# EAGLE board Sketch (EAGLE 7.5.0)
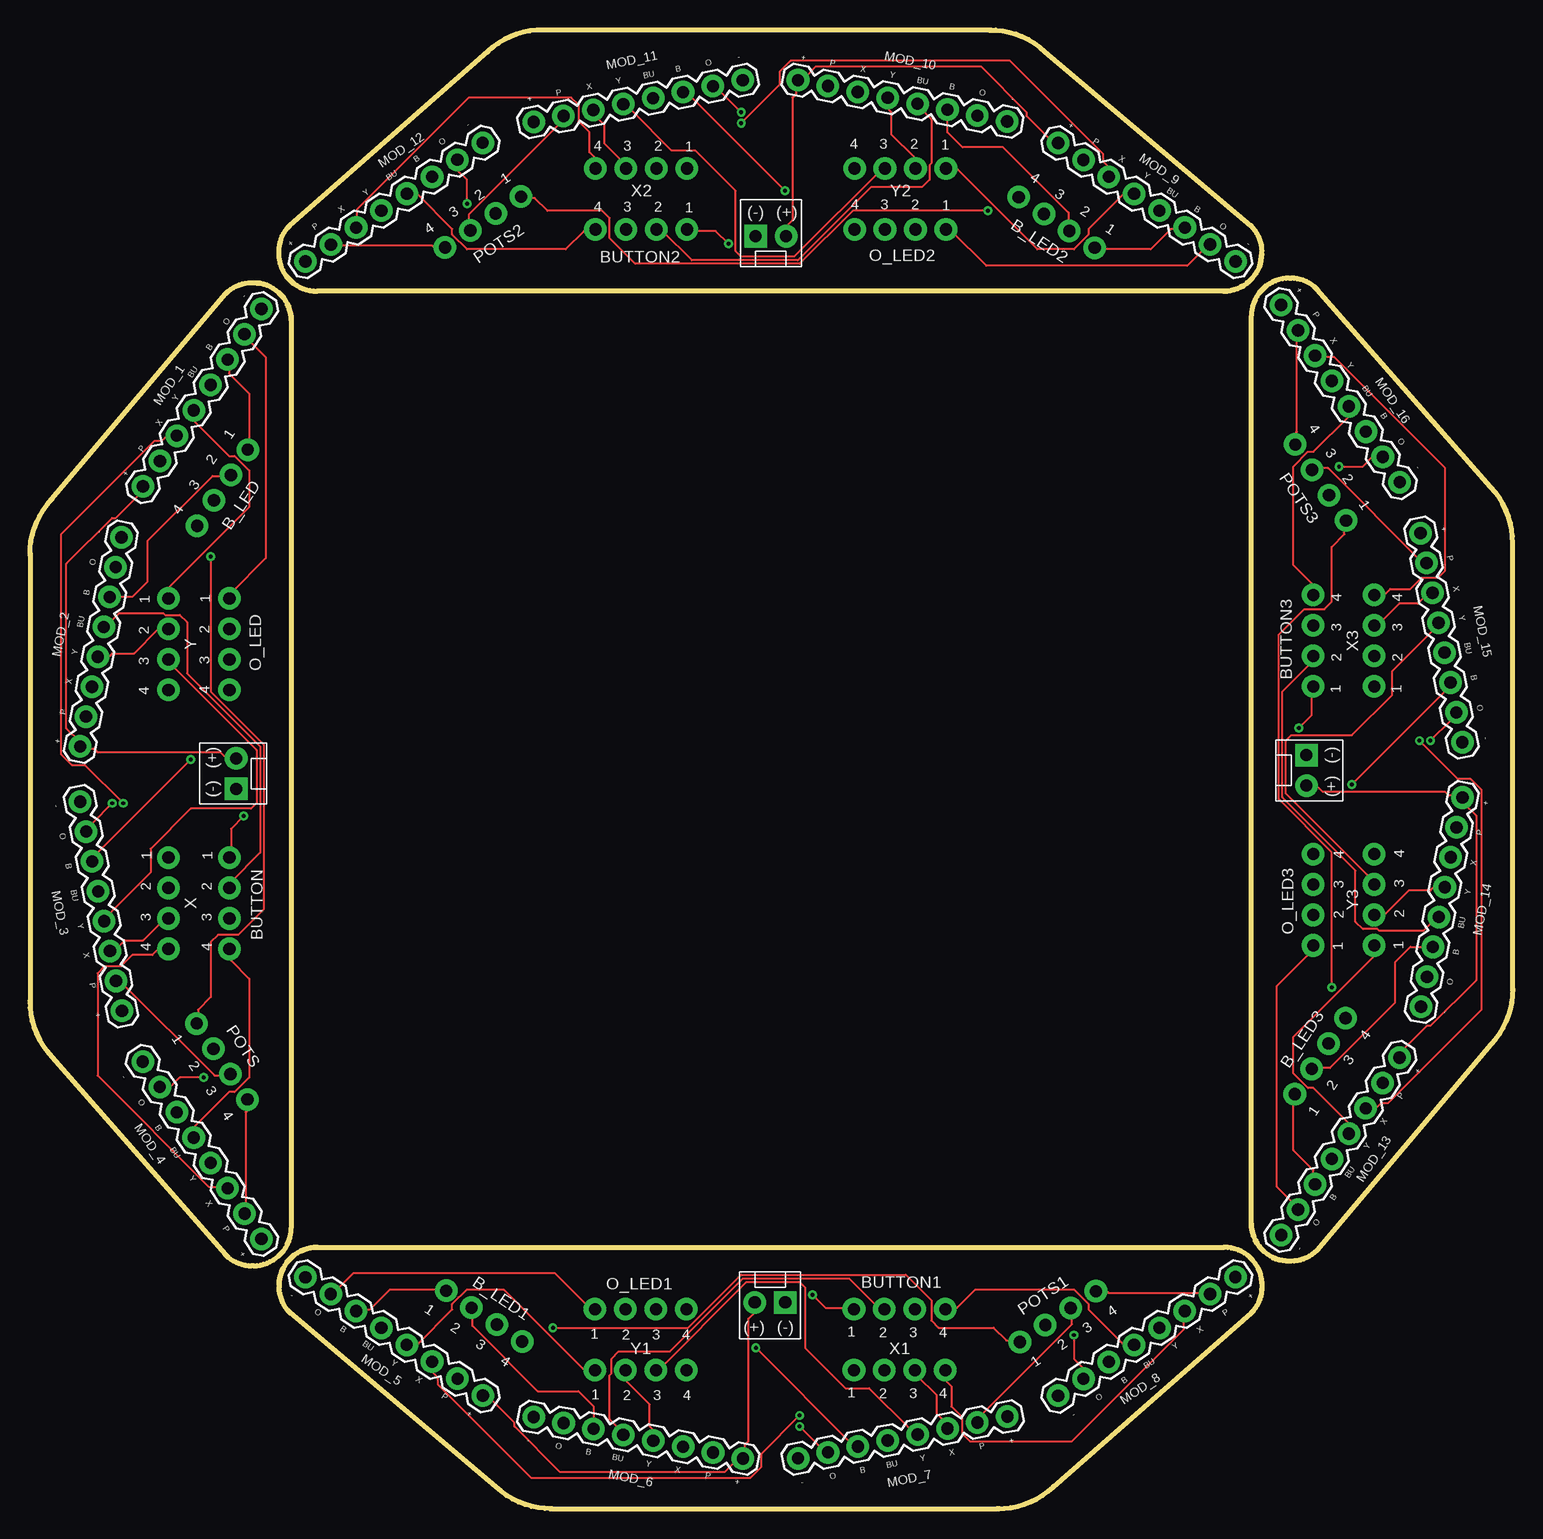
[diagram p0: board, top side]
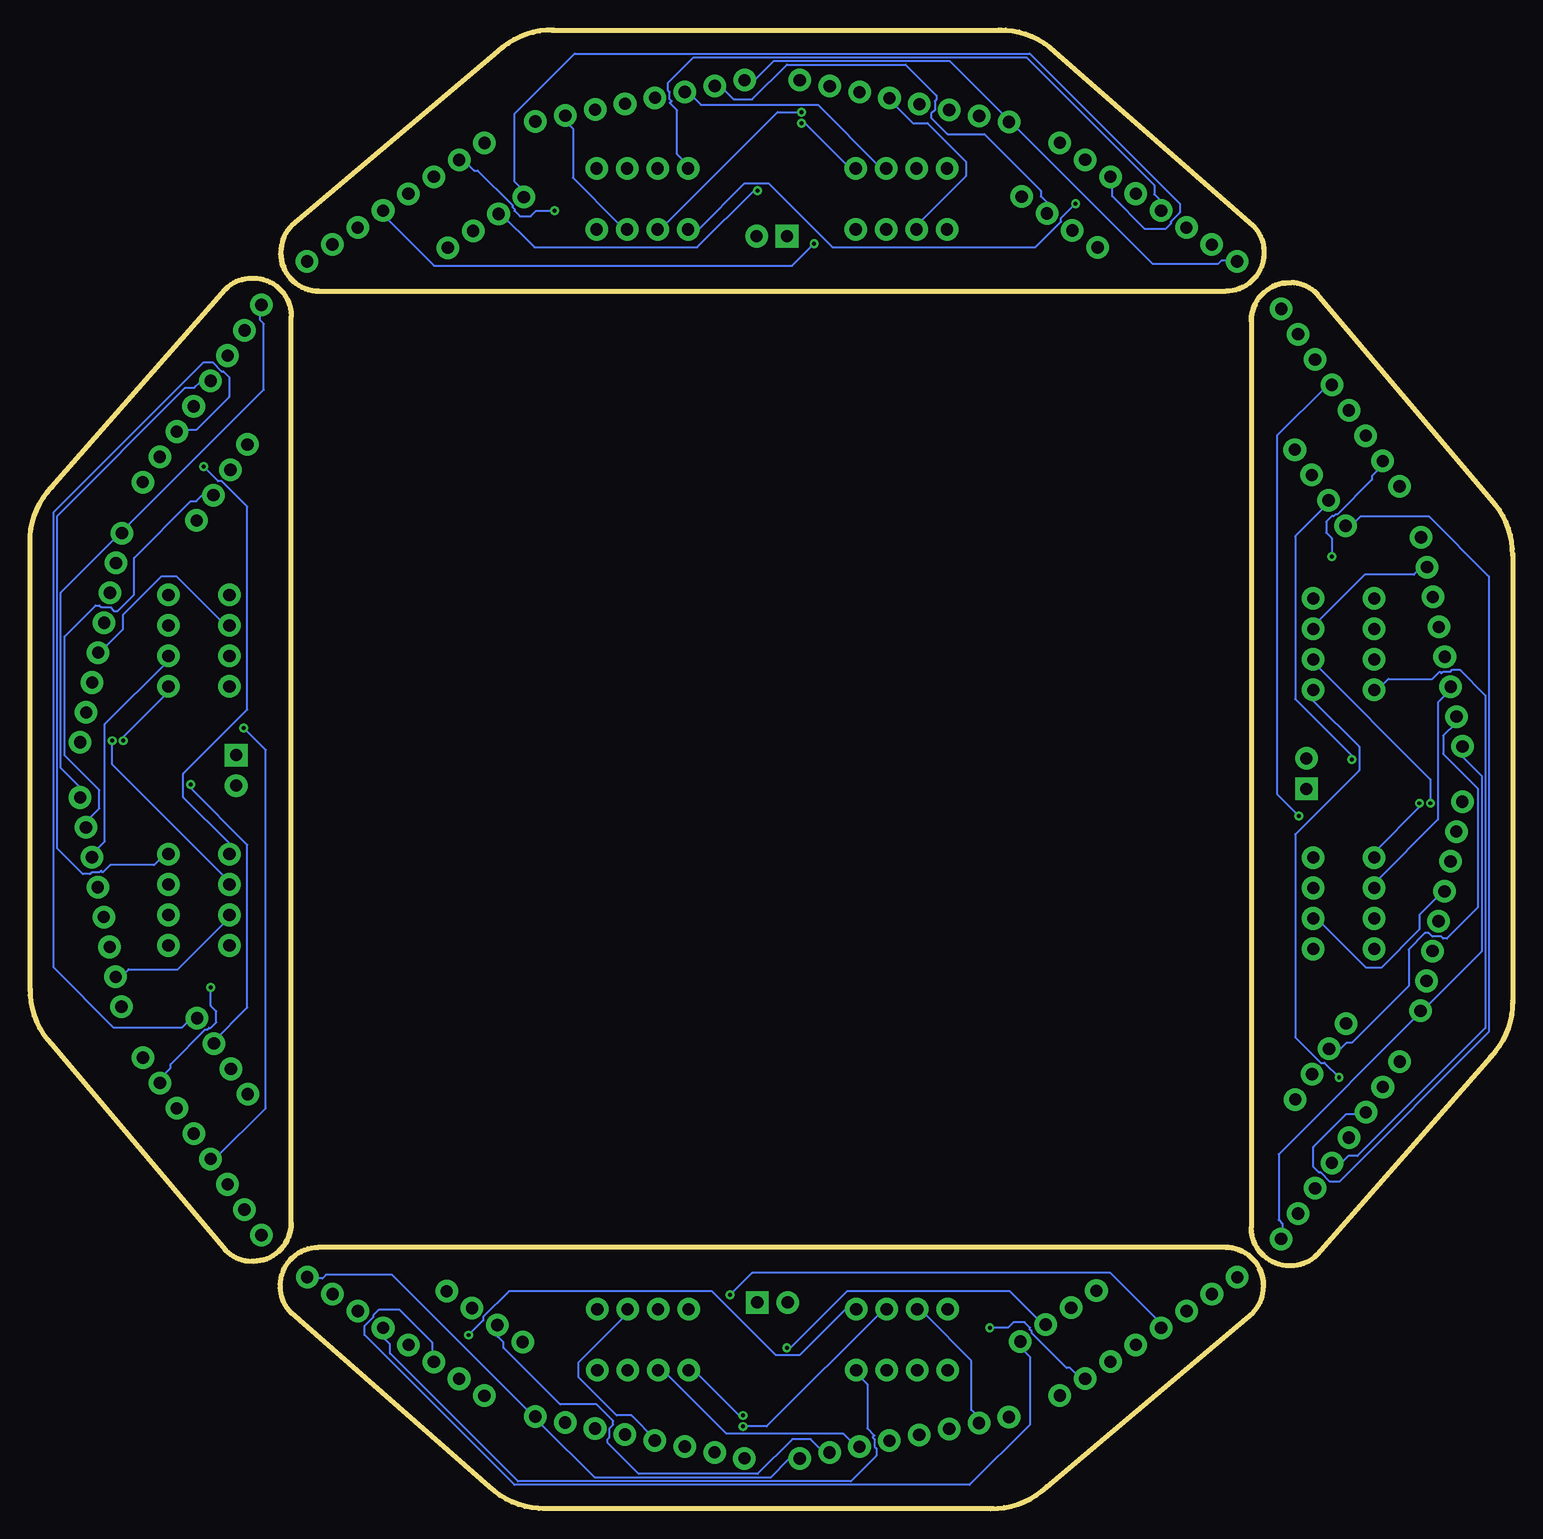
[diagram p1: board, bottom side, seen from below]

Size 123.59 x 123.26 mm. Coordinates in mm from the lower left corner, seen from the top.
Outline: 0,79.64 0,42.34
Outline: 0,42.34 0,42.15
Outline: 18.61,20.24 arc90 21.78,23.42 21.78,99.01
Outline: 21.78,99.01 arc90 18.61,102.19 arc-90 21.78,99.01
Outline: 0,42.34 arc45 1.82,37.66 16.31,21.14 arc45 18.48,20.24
Outline: 0,79.45 arc-45 1.82,84.13 16.31,101.29 arc-45 18.48,102.19
Outline: 43.32,0 80.62,0
Outline: 80.62,0 80.81,0
Outline: 102.72,18.61 arc90 99.54,21.78 23.95,21.78
Outline: 23.95,21.78 arc90 20.78,18.61 arc-90 23.95,21.78
Outline: 80.62,0 arc45 85.3,1.82 101.82,16.31 arc45 102.72,18.48
Outline: 43.51,0 arc-45 38.83,1.82 21.67,16.31 arc-45 20.78,18.48
Outline: 80.13,123.26 42.83,123.26
Outline: 42.83,123.26 42.64,123.26
Outline: 20.73,104.65 arc90 23.91,101.48 99.5,101.47
Outline: 99.5,101.47 arc90 102.67,104.65 arc-90 99.5,101.47
Outline: 42.83,123.26 arc45 38.15,121.43 21.63,106.95 arc45 20.73,104.78
Outline: 79.94,123.26 arc-45 84.62,121.43 101.78,106.94 arc-45 102.67,104.78
Outline: 123.59,43.17 123.59,80.47
Outline: 123.59,80.47 123.59,80.66
Outline: 104.99,102.57 arc90 101.81,99.39 101.81,23.8
Outline: 101.81,23.8 arc90 104.98,20.62 arc-90 101.81,23.8
Outline: 123.59,80.47 arc45 121.77,85.15 107.28,101.67 arc45 105.11,102.57
Outline: 123.59,43.36 arc-45 121.77,38.68 107.28,21.52 arc-45 105.11,20.62
Copper layers (1*16): Top 0.035mm / dielectric 1.5mm / Bottom 0.035mm
Design rules "default": minimum track width 10mil, minimum drill 24mil, track to track 8mil, track to pad 8mil, pad to pad 8mil, via to via 8mil, smd to smd 8mil, copper to edge 40mil, drill to drill 8mil, minimum pad ring 10mil, minimum via ring 8mil, stop-mask expansion 4mil, vias tented up to drill 0mil, thermal gap 10mil

## Footprints (pad centres in the part's own frame; a part is rotated, then mirrored left to right if it is on the bottom)
1X04_NO_SILK_ALL_ROUND = drill 1.016 pad 1.88: 1 0,0; 2 2.54,0; 3 5.08,0; 4 7.62,0
1X08_ROUND = drill 1.016 pad 1.88: 1 0,0; 2 2.54,0; 3 5.08,0; 4 7.62,0; 5 10.16,0; 6 12.7,0; 7 15.24,0; 8 17.78,0
MOLEX-1X2 = drill 1.016 pad 1.88 square: 1 0,0 | drill 1.016 pad 1.88: 2 2.54,0

## Placement (x,y rotation side)
B_LED  [1X04_NO_SILK_ALL_ROUND]  18.16,88.27 236.3 top
B_LED1  [1X04_NO_SILK_ALL_ROUND]  34.69,18.16 326.3 top
B_LED2  [1X04_NO_SILK_ALL_ROUND]  88.76,105.1 146.3 top
B_LED3  [1X04_NO_SILK_ALL_ROUND]  105.44,34.54 56.3 top
BUTTON  [1X04_NO_SILK_ALL_ROUND]  16.62,54.27 270 top
BUTTON1  [1X04_NO_SILK_ALL_ROUND]  68.69,16.62 0 top
BUTTON2  [1X04_NO_SILK_ALL_ROUND]  54.76,106.64 180 top
BUTTON3  [1X04_NO_SILK_ALL_ROUND]  106.97,68.54 90 top
MOD_1  [1X08_ROUND]  19.29,100.01 236.3 top
MOD_2  [1X08_ROUND]  7.63,80.97 258.8 top
MOD_3  [1X08_ROUND]  4.18,58.93 281.3 top
MOD_4  [1X08_ROUND]  9.41,37.25 303.8 top
MOD_5  [1X08_ROUND]  22.95,19.29 326.3 top
MOD_6  [1X08_ROUND]  41.99,7.63 348.8 top
MOD_7  [1X08_ROUND]  64.03,4.18 11.3 top
MOD_8  [1X08_ROUND]  85.71,9.41 33.8 top
MOD_9  [1X08_ROUND]  100.5,103.97 146.3 top
MOD_10  [1X08_ROUND]  81.46,115.63 168.8 top
MOD_11  [1X08_ROUND]  59.42,119.07 191.3 top
MOD_12  [1X08_ROUND]  37.74,113.85 213.8 top
MOD_13  [1X08_ROUND]  104.3,22.8 56.3 top
MOD_14  [1X08_ROUND]  115.96,41.84 78.8 top
MOD_15  [1X08_ROUND]  119.41,63.88 101.3 top
MOD_16  [1X08_ROUND]  114.18,85.56 123.8 top
O_LED  [1X04_NO_SILK_ALL_ROUND]  16.62,75.86 270 top
O_LED1  [1X04_NO_SILK_ALL_ROUND]  47.1,16.62 0 top
O_LED2  [1X04_NO_SILK_ALL_ROUND]  76.35,106.64 180 top
O_LED3  [1X04_NO_SILK_ALL_ROUND]  106.97,46.95 90 top
POTS  [1X04_NO_SILK_ALL_ROUND]  13.88,40.44 303.8 top
POTS1  [1X04_NO_SILK_ALL_ROUND]  82.52,13.88 33.8 top
POTS2  [1X04_NO_SILK_ALL_ROUND]  40.93,109.37 213.8 top
POTS3  [1X04_NO_SILK_ALL_ROUND]  109.71,82.37 123.8 top
POWER  [MOLEX-1X2]  17.19,60 90 top
POWER1  [MOLEX-1X2]  62.96,17.19 180 top
POWER2  [MOLEX-1X2]  60.49,106.07 0 top
POWER3  [MOLEX-1X2]  106.4,62.81 270 top
X  [1X04_NO_SILK_ALL_ROUND]  11.54,54.27 270 top
X1  [1X04_NO_SILK_ALL_ROUND]  68.69,11.54 0 top
X2  [1X04_NO_SILK_ALL_ROUND]  54.76,111.72 180 top
X3  [1X04_NO_SILK_ALL_ROUND]  112.05,68.54 90 top
Y  [1X04_NO_SILK_ALL_ROUND]  11.54,75.86 270 top
Y1  [1X04_NO_SILK_ALL_ROUND]  47.1,11.54 0 top
Y2  [1X04_NO_SILK_ALL_ROUND]  76.35,111.72 180 top
Y3  [1X04_NO_SILK_ALL_ROUND]  112.05,46.95 90 top

## Library data of the parts
B_LED B_LED1-B_LED3 BUTTON BUTTON1-BUTTON3 O_LED O_LED1-O_LED3 POTS POTS1-POTS3 X X1-X3 Y Y1-Y3 = SparkFun-Connectors; PROD_ID: CONN-09696
MOD_1-MOD_16 = SparkFun-Connectors; PROD_ID: CONN-08437
POWER POWER1-POWER3 = SparkFun-Connectors

## Nets
5V: MOD_1.8 MOD_2.8 MOD_3.8 MOD_4.8 POWER.2
5V1: MOD_5.8 MOD_6.8 MOD_7.8 MOD_8.8 POWER1.2
5V2: MOD_9.8 MOD_10.8 MOD_11.8 MOD_12.8 POWER2.2
5V3: MOD_13.8 MOD_14.8 MOD_15.8 MOD_16.8 POWER3.2
GND: MOD_1.1 MOD_2.1 MOD_3.1 MOD_4.1 POWER.1
GND1: MOD_5.1 MOD_6.1 MOD_7.1 MOD_8.1 POWER1.1
GND2: MOD_9.1 MOD_10.1 MOD_11.1 MOD_12.1 POWER2.1
GND3: MOD_13.1 MOD_14.1 MOD_15.1 MOD_16.1 POWER3.1
M1_BTN: BUTTON.1 MOD_1.4
M1_BTN1: BUTTON1.1 MOD_5.4
M1_BTN2: BUTTON2.1 MOD_9.4
M1_BTN3: BUTTON3.1 MOD_13.4
M1_LED1: MOD_1.2 O_LED.1
M1_LED2: B_LED.1 MOD_1.3
M1_LED3: B_LED1.1 MOD_5.3
M1_LED4: MOD_5.2 O_LED1.1
M1_LED5: B_LED2.1 MOD_9.3
M1_LED6: MOD_9.2 O_LED2.1
M1_LED7: B_LED3.1 MOD_13.3
M1_LED8: MOD_13.2 O_LED3.1
M1_POT: MOD_1.7 POTS.1
M1_POT1: MOD_5.7 POTS1.1
M1_POT2: MOD_9.7 POTS2.1
M1_POT3: MOD_13.7 POTS3.1
M1_X: MOD_1.6 X.1
M1_X1: MOD_5.6 X1.1
M1_X2: MOD_9.6 X2.1
M1_X3: MOD_13.6 X3.1
M1_Y: MOD_1.5 Y.1
M1_Y1: MOD_5.5 Y1.1
M1_Y2: MOD_9.5 Y2.1
M1_Y3: MOD_13.5 Y3.1
M2_BTN: BUTTON.2 MOD_2.4
M2_BTN1: BUTTON1.2 MOD_6.4
M2_BTN2: BUTTON2.2 MOD_10.4
M2_BTN3: BUTTON3.2 MOD_14.4
M2_LED1: MOD_2.2 O_LED.2
M2_LED2: B_LED.2 MOD_2.3
M2_LED3: B_LED1.2 MOD_6.3
M2_LED4: MOD_6.2 O_LED1.2
M2_LED5: B_LED2.2 MOD_10.3
M2_LED6: MOD_10.2 O_LED2.2
M2_LED7: B_LED3.2 MOD_14.3
M2_LED8: MOD_14.2 O_LED3.2
M2_POT: MOD_2.7 POTS.2
M2_POT1: MOD_6.7 POTS1.2
M2_POT2: MOD_10.7 POTS2.2
M2_POT3: MOD_14.7 POTS3.2
M2_X: MOD_2.6 X.2
M2_X1: MOD_6.6 X1.2
M2_X2: MOD_10.6 X2.2
M2_X3: MOD_14.6 X3.2
M2_Y: MOD_2.5 Y.2
M2_Y1: MOD_6.5 Y1.2
M2_Y2: MOD_10.5 Y2.2
M2_Y3: MOD_14.5 Y3.2
M3_BTN: BUTTON.3 MOD_3.4
M3_BTN1: BUTTON1.3 MOD_7.4
M3_BTN2: BUTTON2.3 MOD_11.4
M3_BTN3: BUTTON3.3 MOD_15.4
M3_LED1: MOD_3.2 O_LED.3
M3_LED2: B_LED.3 MOD_3.3
M3_LED3: B_LED1.3 MOD_7.3
M3_LED4: MOD_7.2 O_LED1.3
M3_LED5: B_LED2.3 MOD_11.3
M3_LED6: MOD_11.2 O_LED2.3
M3_LED7: B_LED3.3 MOD_15.3
M3_LED8: MOD_15.2 O_LED3.3
M3_POT: MOD_3.7 POTS.3
M3_POT1: MOD_7.7 POTS1.3
M3_POT2: MOD_11.7 POTS2.3
M3_POT3: MOD_15.7 POTS3.3
M3_X: MOD_3.6 X.3
M3_X1: MOD_7.6 X1.3
M3_X2: MOD_11.6 X2.3
M3_X3: MOD_15.6 X3.3
M3_Y: MOD_3.5 Y.3
M3_Y1: MOD_7.5 Y1.3
M3_Y2: MOD_11.5 Y2.3
M3_Y3: MOD_15.5 Y3.3
M4_BTN: BUTTON.4 MOD_4.4
M4_BTN1: BUTTON1.4 MOD_8.4
M4_BTN2: BUTTON2.4 MOD_12.4
M4_BTN3: BUTTON3.4 MOD_16.4
M4_LED1: MOD_4.2 O_LED.4
M4_LED2: B_LED.4 MOD_4.3
M4_LED3: B_LED1.4 MOD_8.3
M4_LED4: MOD_8.2 O_LED1.4
M4_LED5: B_LED2.4 MOD_12.3
M4_LED6: MOD_12.2 O_LED2.4
M4_LED7: B_LED3.4 MOD_16.3
M4_LED8: MOD_16.2 O_LED3.4
M4_POT: MOD_4.7 POTS.4
M4_POT1: MOD_8.7 POTS1.4
M4_POT2: MOD_12.7 POTS2.4
M4_POT3: MOD_16.7 POTS3.4
M4_X: MOD_4.6 X.4
M4_X1: MOD_8.6 X1.4
M4_X2: MOD_12.6 X2.4
M4_X3: MOD_16.6 X3.4
M4_Y: MOD_4.5 Y.4
M4_Y1: MOD_8.5 Y1.4
M4_Y2: MOD_12.5 Y2.4
M4_Y3: MOD_16.5 Y3.4

## Tracks (layer width: path | path; a pad name or v marks a point on that pad's centre or on a via)
5V
  Top 0.152: POWER.2 17.06,62.61 16.29,62.61 15.84,63.07 5.63,63.07 5.32,63.37 4.41,63.37 4.25,63.52 MOD_2.8 4.1,63.68 4.1,63.98 3.04,65.05 3.04,78.76 6.85,82.57 7.15,82.57 9.28,84.71 9.28,85.16 MOD_1.8
  Bottom 0.152: MOD_4.8 19.19,22.53 19.19,23.75 19.49,24.05 19.49,29.54 7.61,41.43 MOD_3.8 7.61,41.58 7.15,42.03 7,42.03 2.58,46.45 2.58,61.08 4.1,62.61 4.1,63.52 MOD_2.8
5V1
  Top 0.152: POWER1.2 60.35,17.06 60.35,16.29 59.9,15.84 59.9,5.63 59.59,5.32 59.59,4.41 59.44,4.25 MOD_6.8 59.29,4.1 58.98,4.1 57.91,3.04 44.2,3.04 40.39,6.85 40.39,7.15 38.25,9.28 37.8,9.28 MOD_5.8
  Bottom 0.152: MOD_8.8 100.43,19.19 99.21,19.19 98.91,19.49 93.42,19.49 81.54,7.61 MOD_7.8 81.38,7.61 80.93,7.15 80.93,7 76.51,2.58 61.88,2.58 60.35,4.1 59.44,4.1 MOD_6.8
5V2
  Top 0.152: POWER2.2 63.1,106.2 63.1,106.96 63.55,107.42 63.55,117.63 63.86,117.94 63.86,118.85 64.01,119 MOD_10.8 64.16,119.15 64.47,119.15 65.54,120.22 79.25,120.22 83.06,116.41 83.06,116.11 85.2,113.97 85.65,113.97 MOD_9.8
  Bottom 0.152: MOD_12.8 23.02,104.07 24.24,104.07 24.54,103.76 30.03,103.76 41.91,115.65 MOD_11.8 42.07,115.65 42.52,116.11 42.52,116.26 46.94,120.68 61.57,120.68 63.1,119.15 64.01,119.15 MOD_10.8
5V3
  Top 0.152: POWER3.2 106.54,60.2 107.3,60.2 107.75,59.74 117.97,59.74 118.27,59.44 119.18,59.44 119.34,59.29 MOD_14.8 119.49,59.13 119.49,58.83 120.56,57.76 120.56,44.05 116.75,40.24 116.44,40.24 114.31,38.1 114.31,37.65 MOD_13.8
  Bottom 0.152: MOD_16.8 104.4,100.28 104.4,99.06 104.1,98.76 104.1,93.27 115.98,81.38 MOD_15.8 115.98,81.23 116.44,80.77 116.59,80.77 121.01,76.36 121.01,61.72 119.49,60.2 119.49,59.29 MOD_14.8
M1_BTN  (via drill 0.33)
  Top 0.152: v17.82,57.73 16.75,56.67 16.75,54.38 BUTTON.1
  Bottom 0.152: v17.82,57.73 19.65,59.56 19.65,89.43 15.53,93.55 15.08,93.55 MOD_1.4
M1_BTN1  (via drill 0.33)
  Top 0.152: v65.23,17.82 66.3,16.75 68.58,16.75 BUTTON1.1
  Bottom 0.152: v65.23,17.82 63.4,19.65 33.53,19.65 29.42,15.53 29.42,15.08 MOD_5.4
M1_BTN2  (via drill 0.33)
  Top 0.152: v58.22,105.44 57.15,106.51 54.87,106.51 BUTTON2.1
  Bottom 0.152: v58.22,105.44 60.05,103.61 89.92,103.61 94.03,107.72 94.03,108.18 MOD_9.4
M1_BTN3  (via drill 0.33)
  Top 0.152: v105.77,65.08 106.84,66.14 106.84,68.43 BUTTON3.1
  Bottom 0.152: v105.77,65.08 103.94,63.25 103.94,33.38 108.06,29.26 108.52,29.26 MOD_13.4
M1_LED1
  Top 0.152: O_LED.1 16.75,75.87 16.75,76.32 19.65,79.22 19.65,95.98 17.82,97.81 MOD_1.2
M1_LED2
  Top 0.152: B_LED.1 18.28,88.36 18.28,92.94 16.6,94.61 16.6,95.68 MOD_1.3
M1_LED3
  Top 0.152: B_LED1.1 34.6,18.28 30.03,18.28 28.35,16.6 27.28,16.6 MOD_5.3
M1_LED4
  Top 0.152: O_LED1.1 47.09,16.75 46.64,16.75 43.74,19.65 26.98,19.65 25.15,17.82 MOD_5.2
M1_LED5
  Top 0.152: B_LED2.1 88.85,104.98 93.43,104.98 95.1,106.66 96.17,106.66 MOD_9.3
M1_LED6
  Top 0.152: O_LED2.1 76.36,106.51 76.81,106.51 79.71,103.61 96.47,103.61 98.3,105.44 MOD_9.2
M1_LED7
  Top 0.152: B_LED3.1 105.32,34.45 105.32,29.87 106.99,28.2 106.99,27.13 MOD_13.3
M1_LED8
  Top 0.152: O_LED3.1 106.84,46.94 106.84,46.48 103.94,43.59 103.94,26.83 105.77,25 MOD_13.2
M1_POT  (via drill 0.33)
  Top 0.152: v15.08,79.37 15.08,68.1 19.49,63.68 19.49,49.96 17.36,47.83 15.68,47.83 15.08,47.22 15.08,42.64 14.01,41.58 14.01,40.51 POTS.1
  Bottom 0.152: v15.08,79.37 15.08,80.9 15.53,81.35 15.53,82.27 15.08,82.73 14.92,82.73 14.77,82.88 14.62,82.88 11.72,85.77 11.72,86.08 10.96,86.84 10.96,87.3 MOD_1.7
M1_POT1  (via drill 0.33)
  Top 0.152: v43.59,15.08 54.87,15.08 59.29,19.49 73,19.49 75.14,17.36 75.14,15.68 75.75,15.08 80.32,15.08 81.38,14.01 82.45,14.01 POTS1.1
  Bottom 0.152: v43.59,15.08 42.06,15.08 41.61,15.53 40.69,15.53 40.24,15.08 40.24,14.92 40.08,14.77 40.08,14.62 37.19,11.72 36.88,11.72 36.12,10.96 35.66,10.96 MOD_5.7
M1_POT2  (via drill 0.33)
  Top 0.152: v79.86,108.18 68.58,108.18 64.16,103.76 50.45,103.76 48.31,105.9 48.31,107.57 47.71,108.18 43.13,108.18 42.07,109.25 41,109.25 POTS2.1
  Bottom 0.152: v79.86,108.18 81.39,108.18 81.84,107.72 82.76,107.72 83.21,108.18 83.21,108.33 83.37,108.49 83.37,108.64 86.26,111.53 86.57,111.53 87.33,112.3 87.79,112.3 MOD_9.7
M1_POT3  (via drill 0.33)
  Top 0.152: v108.52,43.44 108.52,54.71 104.1,59.13 104.1,72.85 106.23,74.98 107.91,74.98 108.52,75.59 108.52,80.17 109.58,81.23 109.58,82.3 POTS3.1
  Bottom 0.152: v108.52,43.44 108.52,41.91 108.06,41.46 108.06,40.54 108.52,40.08 108.67,40.08 108.82,39.93 108.97,39.93 111.87,37.04 111.87,36.73 112.63,35.97 112.63,35.51 MOD_13.7
M1_X  (via drill 0.33)
  Top 0.152: v7.76,58.8 4.56,62 3.49,62 2.58,62.91 2.58,81.2 10.35,88.97 10.96,88.97 11.42,89.43 12.18,89.43 MOD_1.6
  Bottom 0.152: v7.76,58.8 7.76,58.49 11.42,54.84 11.42,54.38 X.1
M1_X1  (via drill 0.33)
  Top 0.152: v64.16,7.76 60.96,4.56 60.96,3.49 60.05,2.58 41.76,2.58 33.99,10.35 33.99,10.96 33.53,11.42 33.53,12.18 MOD_5.6
  Bottom 0.152: v64.16,7.76 64.47,7.76 68.13,11.42 68.58,11.42 X1.1
M1_X2  (via drill 0.33)
  Top 0.152: v59.29,115.5 62.49,118.7 62.49,119.76 63.4,120.68 81.69,120.68 89.46,112.91 89.46,112.3 89.92,111.84 89.92,111.08 MOD_9.6
  Bottom 0.152: v59.29,115.5 58.98,115.5 55.33,111.84 54.87,111.84 X2.1
M1_X3  (via drill 0.33)
  Top 0.152: v115.83,64.01 119.03,60.81 120.1,60.81 121.01,59.9 121.01,41.61 113.24,33.84 112.63,33.84 112.17,33.38 111.41,33.38 MOD_13.6
  Bottom 0.152: v115.83,64.01 115.83,64.32 112.17,67.97 112.17,68.43 X3.1
M1_Y
  Top 0.152: Y.1 11.57,75.87 11.57,76.78 18.28,83.49 18.28,86.54 17.06,87.75 16.6,87.75 13.7,90.65 13.7,91.41 MOD_1.5
M1_Y1
  Top 0.152: Y1.1 47.09,11.57 46.18,11.57 39.47,18.28 36.43,18.28 35.21,17.06 35.21,16.6 32.31,13.7 31.55,13.7 MOD_5.5
M1_Y2
  Top 0.152: Y2.1 76.36,111.69 77.27,111.69 83.98,104.98 87.02,104.98 88.24,106.2 88.24,106.66 91.14,109.55 91.9,109.55 MOD_9.5
M1_Y3
  Top 0.152: Y3.1 112.02,46.94 112.02,46.03 105.32,39.32 105.32,36.27 106.54,35.05 106.99,35.05 109.89,32.16 109.89,31.4 MOD_13.5
M2_BTN
  Top 0.152: BUTTON.2 16.75,51.79 16.75,52.25 19.19,54.68 19.19,63.52 13.09,69.62 13.09,73.89 12.48,74.5 11.27,74.5 11.11,74.65 7.46,74.65 6.24,73.43 MOD_2.4
M2_BTN1
  Top 0.152: BUTTON1.2 71.17,16.75 70.72,16.75 68.28,19.19 59.44,19.19 53.34,13.09 49.08,13.09 48.47,12.48 48.47,11.27 48.31,11.11 48.31,7.46 49.53,6.24 MOD_6.4
M2_BTN2
  Top 0.152: BUTTON2.2 52.28,106.51 52.73,106.51 55.17,104.07 64.01,104.07 70.11,110.16 74.38,110.16 74.98,110.77 74.98,111.99 75.14,112.14 75.14,115.8 73.92,117.02 MOD_10.4
M2_BTN3
  Top 0.152: BUTTON3.2 106.84,71.02 106.84,70.56 104.4,68.13 104.4,59.29 110.5,53.19 110.5,48.92 111.11,48.31 112.33,48.31 112.48,48.16 116.14,48.16 117.36,49.38 MOD_14.4
M2_LED1
  Bottom 0.152: O_LED.2 16.6,73.43 16.14,73.89 16.14,74.04 12.33,77.85 8.22,77.85 7.61,78.46 7.15,78.46 MOD_2.2
M2_LED2
  Top 0.152: B_LED.2 16.6,86.08 15.23,86.08 9.78,80.63 9.78,77.24 8.53,75.99 MOD_2.3 6.69,75.87
M2_LED3
  Top 0.152: B_LED1.2 36.88,16.6 36.88,15.23 42.33,9.78 45.72,9.78 46.97,8.53 MOD_6.3 47.09,6.69
M2_LED4
  Bottom 0.152: O_LED1.2 49.53,16.6 49.08,16.14 48.92,16.14 45.11,12.33 45.11,8.22 44.5,7.61 44.5,7.15 MOD_6.2
M2_LED5
  Top 0.152: B_LED2.2 86.57,106.66 86.57,108.03 81.12,113.48 77.73,113.48 76.48,114.73 MOD_10.3 76.36,116.56
M2_LED6
  Bottom 0.152: O_LED2.2 73.92,106.66 74.38,107.11 74.53,107.11 78.34,110.92 78.34,115.04 78.95,115.65 78.95,116.11 MOD_10.2
M2_LED7
  Top 0.152: B_LED3.2 106.99,36.73 108.36,36.73 113.81,42.18 113.81,45.57 115.06,46.82 MOD_14.3 116.9,46.94
M2_LED8
  Bottom 0.152: O_LED3.2 106.99,49.38 107.45,48.92 107.45,48.77 111.26,44.96 115.37,44.96 115.98,44.35 116.44,44.35 MOD_14.2
M2_POT
  Bottom 0.152: POTS.2 15.23,38.38 14.31,38.38 13.86,38.83 13.4,38.83 8.67,43.56 8.67,46.61 7.3,47.98 7,47.98 6.69,47.67 5.93,47.67 5.78,47.52 5.47,47.52 2.88,50.11 2.88,60.02 5.78,62.91 5.78,64.44 4.71,65.5 4.71,65.96 MOD_2.7
M2_POT1
  Bottom 0.152: POTS1.2 84.58,15.23 84.58,14.31 84.13,13.86 84.13,13.4 79.4,8.67 76.35,8.67 74.98,7.3 74.98,7 75.29,6.69 75.29,5.93 75.44,5.78 75.44,5.47 72.85,2.88 62.94,2.88 60.05,5.78 58.52,5.78 57.46,4.71 57,4.71 MOD_6.7
M2_POT2
  Bottom 0.152: POTS2.2 38.87,108.03 38.87,108.94 39.32,109.4 39.32,109.86 44.05,114.58 47.1,114.58 48.47,115.95 48.47,116.26 48.16,116.56 48.16,117.33 48.01,117.48 48.01,117.78 50.6,120.37 60.51,120.37 63.4,117.48 64.93,117.48 65.99,118.54 66.45,118.54 MOD_10.7
M2_POT3
  Bottom 0.152: POTS3.2 108.36,84.43 109.28,84.43 109.74,83.98 110.19,83.98 114.92,79.25 114.92,76.2 116.29,74.83 116.59,74.83 116.9,75.14 117.66,75.14 117.81,75.29 118.12,75.29 120.71,72.7 120.71,62.79 117.81,59.9 117.81,58.37 118.88,57.31 118.88,56.85 MOD_14.7
M2_X
  Bottom 0.152: X.2 11.42,51.79 11.42,52.25 6.24,57.43 6.24,67.18 5.02,68.4 MOD_2.6
M2_X1
  Bottom 0.152: X1.2 71.17,11.42 70.72,11.42 65.53,6.24 55.78,6.24 54.56,5.02 MOD_6.6
M2_X2
  Bottom 0.152: X2.2 52.28,111.84 52.73,111.84 57.92,117.02 67.67,117.02 68.89,118.24 MOD_10.6
M2_X3
  Bottom 0.152: X3.2 112.17,71.02 112.17,70.56 117.36,65.38 117.36,55.63 118.57,54.41 MOD_14.6
M2_Y
  Top 0.152: Y.2 11.42,73.28 10.66,73.28 8.67,71.3 6.85,71.3 6.54,70.99 5.78,70.99 MOD_2.5
M2_Y1
  Top 0.152: Y1.2 49.68,11.42 49.68,10.66 51.67,8.67 51.67,6.85 51.97,6.54 51.97,5.78 MOD_6.5
M2_Y2
  Top 0.152: Y2.2 73.77,111.84 73.77,112.6 71.78,114.58 71.78,116.41 71.48,116.72 71.48,117.48 MOD_10.5
M2_Y3
  Top 0.152: Y3.2 112.17,49.53 112.94,49.53 114.92,51.51 116.75,51.51 117.05,51.82 117.81,51.82 MOD_14.5
M3_BTN
  Bottom 0.152: BUTTON.3 16.6,49.05 16.14,49.05 12.18,45.08 10.96,45.08 7.76,48.28 7.76,49.5 5.78,51.48 MOD_3.4
M3_BTN1
  Bottom 0.152: BUTTON1.3 73.92,16.6 73.92,16.14 77.88,12.18 77.88,10.96 74.68,7.76 73.46,7.76 71.48,5.78 MOD_7.4
M3_BTN2
  Bottom 0.152: BUTTON2.3 49.53,106.66 49.53,107.11 45.57,111.08 45.57,112.3 48.77,115.5 49.99,115.5 51.97,117.48 MOD_11.4
M3_BTN3
  Bottom 0.152: BUTTON3.3 106.99,73.76 107.45,73.76 111.41,77.73 112.63,77.73 115.83,74.53 115.83,73.31 117.81,71.33 MOD_15.4
M3_LED1  (via drill 0.33)
  Top 0.152: v6.85,58.8 5.17,57.12 5.17,56.97 4.71,56.51 MOD_3.2
  Bottom 0.152: v6.85,58.8 6.85,60.78 16.75,70.69 O_LED.3
M3_LED2  (via drill 0.33)
  Top 0.152: v13.4,62.46 5.32,54.38 5.32,54.07 MOD_3.3
  Bottom 0.152: v13.4,62.46 13.4,62.76 18.12,67.49 18.12,81.05 15.23,83.94 B_LED.3
M3_LED3  (via drill 0.33)
  Top 0.152: v60.51,13.4 68.58,5.32 68.89,5.32 MOD_7.3
  Bottom 0.152: v60.51,13.4 60.2,13.4 55.48,18.12 41.91,18.12 39.02,15.23 B_LED1.3
M3_LED4  (via drill 0.33)
  Top 0.152: v64.16,6.85 65.84,5.17 65.99,5.17 66.45,4.71 MOD_7.2
  Bottom 0.152: v64.16,6.85 62.18,6.85 52.28,16.75 O_LED1.3
M3_LED5  (via drill 0.33)
  Top 0.152: v62.95,109.86 54.87,117.94 54.56,117.94 MOD_11.3
  Bottom 0.152: v62.95,109.86 63.25,109.86 67.97,105.13 81.54,105.13 84.43,108.03 B_LED2.3
M3_LED6  (via drill 0.33)
  Top 0.152: v59.29,116.41 57.61,118.09 57.46,118.09 57,118.54 MOD_11.2
  Bottom 0.152: v59.29,116.41 61.27,116.41 71.17,106.51 O_LED2.3
M3_LED7  (via drill 0.33)
  Top 0.152: v110.19,60.35 118.27,68.43 118.27,68.74 MOD_15.3
  Bottom 0.152: v110.19,60.35 110.19,60.05 105.47,55.32 105.47,41.76 108.36,38.86 B_LED3.3
M3_LED8  (via drill 0.33)
  Top 0.152: v116.75,64.01 118.42,65.69 118.42,65.84 118.88,66.3 MOD_15.2
  Bottom 0.152: v116.75,64.01 116.75,62.03 106.84,52.12 O_LED3.3
M3_POT
  Top 0.152: POTS.3 16.6,36.09 15.38,36.09 7.61,43.86 7.3,43.86 MOD_3.7
M3_POT1
  Top 0.152: POTS1.3 86.87,16.6 86.87,15.38 79.1,7.61 79.1,7.3 MOD_7.7
M3_POT2
  Top 0.152: POTS2.3 36.58,106.66 36.58,107.88 44.35,115.65 44.35,115.95 MOD_11.7
M3_POT3
  Top 0.152: POTS3.3 106.99,86.72 108.21,86.72 115.98,78.95 116.29,78.95 MOD_15.7
M3_X
  Top 0.152: X.3 11.42,49.05 11.11,49.05 9.44,47.37 7.91,47.37 7.15,46.61 6.69,46.61 MOD_3.6
M3_X1
  Top 0.152: X1.3 73.92,11.42 73.92,11.11 75.59,9.44 75.59,7.91 76.35,7.15 76.35,6.69 MOD_7.6
M3_X2
  Top 0.152: X2.3 49.53,111.84 49.53,112.14 47.86,113.82 47.86,115.34 47.1,116.11 47.1,116.56 MOD_11.6
M3_X3
  Top 0.152: X3.3 112.17,73.76 112.48,73.76 114.16,75.44 115.68,75.44 116.44,76.2 116.9,76.2 MOD_15.6
M3_Y
  Top 0.152: MOD_3.5 6.24,49.05 6.69,49.5 6.69,49.65 10.05,53.01 10.05,54.99 13.4,58.34 18.43,58.34 18.89,58.8 18.89,63.22 11.42,70.69 Y.3
M3_Y1
  Top 0.152: MOD_7.5 73.92,6.24 73.46,6.69 73.31,6.69 69.95,10.05 67.97,10.05 64.62,13.4 64.62,18.43 64.16,18.89 59.74,18.89 52.28,11.42 Y1.3
M3_Y2
  Top 0.152: MOD_11.5 49.53,117.02 49.99,116.56 50.14,116.56 53.5,113.21 55.48,113.21 58.83,109.86 58.83,104.83 59.29,104.37 63.71,104.37 71.17,111.84 Y2.3
M3_Y3
  Top 0.152: MOD_15.5 117.36,73.76 116.9,73.31 116.9,73.15 113.55,69.8 113.55,67.82 110.19,64.47 105.16,64.47 104.71,64.01 104.71,59.59 112.17,52.12 Y3.3
M4_BTN
  Top 0.152: MOD_4.4 13.7,31.06 13.7,31.82 16.6,34.72 17.06,34.72 18.28,35.94 18.28,44.17 16.75,45.69 16.75,46.61 BUTTON.4
M4_BTN1
  Top 0.152: MOD_8.4 91.9,13.7 91.14,13.7 88.24,16.6 88.24,17.06 87.02,18.28 78.79,18.28 77.27,16.75 76.35,16.75 BUTTON1.4
M4_BTN2
  Top 0.152: MOD_12.4 31.55,109.55 32.31,109.55 35.21,106.66 35.21,106.2 36.43,104.98 44.66,104.98 46.18,106.51 47.1,106.51 BUTTON2.4
M4_BTN3
  Top 0.152: MOD_16.4 109.89,91.75 109.89,90.99 106.99,88.09 106.54,88.09 105.32,86.87 105.32,78.64 106.84,77.12 106.84,76.2 BUTTON3.4
M4_LED1  (via drill 0.33)
  Top 0.152: v14.47,35.94 12.48,35.94 11.72,35.18 10.96,35.18 MOD_4.2
  Bottom 0.152: v14.47,35.94 15.68,37.16 15.99,37.16 18.12,39.29 18.12,56.21 12.79,61.54 12.79,63.52 16.6,67.33 16.6,68.1 O_LED.4
M4_LED2
  Bottom 0.152: MOD_4.3 12.33,32.89 13.86,32.89 16.6,30.15 16.6,28.47 16.14,28.01 15.99,28.01 15.23,27.25 14.47,27.25 1.97,39.75 1.97,77.7 7,82.73 12.64,82.73 13.4,81.96 13.86,81.96 B_LED.4
M4_LED3
  Bottom 0.152: MOD_8.3 90.07,12.33 90.07,13.86 92.81,16.6 94.49,16.6 94.95,16.14 94.95,15.99 95.71,15.23 95.71,14.47 83.21,1.97 45.27,1.97 40.24,7 40.24,12.64 41,13.4 41,13.86 B_LED1.4
M4_LED4  (via drill 0.33)
  Top 0.152: v87.02,14.47 87.02,12.48 87.78,11.72 87.78,10.96 MOD_8.2
  Bottom 0.152: v87.02,14.47 85.8,15.68 85.8,15.99 83.67,18.12 66.75,18.12 61.42,12.79 59.44,12.79 55.63,16.6 54.87,16.6 O_LED1.4
M4_LED5
  Bottom 0.152: MOD_12.3 33.38,110.92 33.38,109.4 30.64,106.66 28.96,106.66 28.5,107.11 28.5,107.27 27.74,108.03 27.74,108.79 40.24,121.29 78.19,121.29 83.21,116.26 83.21,110.62 82.45,109.86 82.45,109.4 B_LED2.4
M4_LED6  (via drill 0.33)
  Top 0.152: v36.43,108.79 36.43,110.77 35.67,111.53 35.67,112.3 MOD_12.2
  Bottom 0.152: v36.43,108.79 37.65,107.57 37.65,107.27 39.78,105.13 56.7,105.13 62.03,110.47 64.01,110.47 67.82,106.66 68.58,106.66 O_LED2.4
M4_LED7
  Bottom 0.152: MOD_16.3 111.26,89.92 109.74,89.92 106.99,92.66 106.99,94.34 107.45,94.8 107.6,94.8 108.36,95.56 109.13,95.56 121.62,83.06 121.62,45.11 116.59,40.08 110.95,40.08 110.19,40.85 109.74,40.85 B_LED3.4
M4_LED8  (via drill 0.33)
  Top 0.152: v109.13,86.87 111.11,86.87 111.87,87.63 112.63,87.63 MOD_16.2
  Bottom 0.152: v109.13,86.87 107.91,85.65 107.6,85.65 105.47,83.52 105.47,66.6 110.8,61.27 110.8,59.29 106.99,55.48 106.99,54.71 O_LED3.4
M4_POT
  Top 0.152: MOD_4.7 17.97,24.66 17.97,33.04 18.12,33.2 18.12,33.96 POTS.4
M4_POT1
  Top 0.152: MOD_8.7 98.3,17.97 89.92,17.97 89.77,18.12 89,18.12 POTS1.4
M4_POT2
  Top 0.152: MOD_12.7 25.15,105.29 33.53,105.29 33.68,105.13 34.45,105.13 POTS2.4
M4_POT3
  Top 0.152: MOD_16.7 105.62,98.15 105.62,89.77 105.47,89.61 105.47,88.85 POTS3.4
M4_X
  Top 0.152: MOD_4.6 16.45,26.79 14.92,26.79 5.63,36.09 5.63,44.63 6.24,45.24 7.61,45.24 8.52,46.15 10.2,46.15 10.66,46.61 11.42,46.61 X.4
M4_X1
  Top 0.152: MOD_8.6 96.17,16.45 96.17,14.92 86.87,5.63 78.34,5.63 77.73,6.24 77.73,7.61 76.81,8.52 76.81,10.2 76.35,10.66 76.35,11.42 X1.4
M4_X2
  Top 0.152: MOD_12.6 27.28,106.81 27.28,108.33 36.58,117.63 45.11,117.63 45.72,117.02 45.72,115.65 46.64,114.73 46.64,113.06 47.1,112.6 47.1,111.84 X2.4
M4_X3
  Top 0.152: MOD_16.6 107.14,96.01 108.67,96.01 117.97,86.72 117.97,78.18 117.36,77.57 115.98,77.57 115.07,76.66 113.39,76.66 112.94,76.2 112.17,76.2 X3.4
M4_Y
  Bottom 0.152: MOD_4.5 14.92,28.93 14.16,28.93 13.7,29.39 12.94,29.39 2.27,40.05 2.27,67.79 4.41,69.92 5.02,69.92 5.17,69.77 5.78,69.77 5.93,69.62 6.08,69.77 6.69,69.16 10.35,69.16 11.42,68.1 Y.4
M4_Y1
  Bottom 0.152: MOD_8.5 94.03,14.92 94.03,14.16 93.58,13.7 93.58,12.94 82.91,2.27 55.17,2.27 53.04,4.41 53.04,5.02 53.19,5.17 53.19,5.78 53.34,5.93 53.19,6.08 53.8,6.69 53.8,10.35 54.87,11.42 Y1.4
M4_Y2
  Bottom 0.152: MOD_12.5 29.42,108.33 29.42,109.1 29.87,109.55 29.87,110.32 40.54,120.98 68.28,120.98 70.41,118.85 70.41,118.24 70.26,118.09 70.26,117.48 70.11,117.33 70.26,117.17 69.65,116.56 69.65,112.91 68.58,111.84 Y2.4
M4_Y3
  Bottom 0.152: MOD_16.5 108.67,93.88 109.43,93.88 109.89,93.42 110.65,93.42 121.32,82.76 121.32,55.02 119.18,52.89 118.57,52.89 118.42,53.04 117.81,53.04 117.66,53.19 117.51,53.04 116.9,53.65 113.24,53.65 112.17,54.71 Y3.4

## Text on the board
tNames: O | - | + | P | BU | B | X | Y | X | Y | BU | B | + | P | O | - | - | + | O | 4 | 3 | 2 | 1 | 4 | 3 | 2 | 1 | P | B | X | BU | 1 | 4 | Y | Y | 2 | 3 | BU | X | 4 | 3 | 2 | 1 | 4 | 3 | 2 | 1 | B | 3 | (-) | (+) | 2 | P | 4 | 1 | O | + | - | + | - | P | O | X | B | Y | BU | Y | BU | X | B | 1 | 4 | P | O | 2 | 3 | + | - | 3 | 2 | 4 | 1 | - | + | O | P | B | X | 1 | 1 | 4 | 4 | Y | BU | 2 | 3 | 3 | 2 | Y | BU | 3 | 3 | 2 | 2 | B | X | 4 | 1 | 1 | 4 | P | O | + | - | (+) | (-) | (-) | (+) | - | + | P | O | 1 | 1 | 4 | 4 | B | X | 2 | 2 | 3 | 3 | Y | BU | 3 | 3 | 2 | 2 | Y | BU | 4 | 4 | 1 | 1 | B | X | P | O | - | + | 4 | 1 | 3 | 2 | + | - | 2 | 3 | P | O | 4 | 1 | X | B | BU | Y | Y | BU | X | B | P | O | - | + | - | + | O | 1 | 4 | P | B | 2 | 1 | 2 | 3 | 4 | (+) | (-) | 1 | 2 | 3 | 4 | 3 | X | BU | 3 | 2 | Y | 4 | 1 | Y | BU | X | B | P | 1 | 2 | 3 | 4 | 1 | 2 | 3 | 4 | O | + | - | - | + | O | B | BU | X | P | Y | X | BU | Y | P | + | O | B | -